# EAGLE board CT_schematic (EAGLE 7.6.0)

Size 100 x 80 mm. Coordinates in mm from the lower left corner, seen from the top.
Outline: 0,0 100,0 100,80 0,80 0,0
Copper layers (1*16): Top 0.035mm / dielectric 1.5mm / Bottom 0.035mm
Design rules "default": minimum track width 10mil, minimum drill 24mil, track to track 8mil, track to pad 8mil, pad to pad 8mil, via to via 8mil, smd to smd 8mil, copper to edge 40mil, drill to drill 8mil, minimum pad ring 10mil, minimum via ring 8mil, stop-mask expansion 4mil, vias tented up to drill 0mil, thermal gap 10mil

## Footprints (pad centres in the part's own frame; a part is rotated, then mirrored left to right if it is on the bottom)
C0603 = smd 0.8 x 0.8: 1 -0.762,0; 2 0.762,0
C0402 = smd 0.5 x 0.5: 1 -0.508,0; 2 0.508,0
C0805 = smd 1.2 x 1.3: 1 -1.016,0; 2 1.016,0
R0603 = smd 0.8 x 0.8: 1 -0.762,0; 2 0.762,0
C1206 = smd 1.3 x 1.6: 1 -1.524,0; 2 1.524,0
L0603 = smd 0.8 x 0.8: 1 -0.762,0; 2 0.762,0
L1210 = smd 1.2 x 2.5: 1 -1.524,0; 2 1.524,0
L0806 = smd 1.016 x 1.524: 1 -0.889,0; 2 0.889,0
UFBGA100 = smd 0.28 x 0.28: A1 -2.75,2.75; A2 -2.25,2.75; A3 -1.75,2.75; A4 -1.25,2.75; A5 -0.75,2.75; A6 -0.25,2.75; A7 0.25,2.75; A8 0.75,2.75; A9 1.25,2.75; A10 1.75,2.75; A11 2.25,2.75; A12 2.75,2.75; B1 -2.75,2.25; B2 -2.25,2.25; B3 -1.75,2.25; B4 -1.25,2.25; B5 -0.75,2.25; B6 -0.25,2.25; B7 0.25,2.25; B8 0.75,2.25; B9 1.25,2.25; B10 1.75,2.25; B11 2.25,2.25; B12 2.75,2.25; C1 -2.75,1.75; C2 -2.25,1.75; C3 -1.75,1.75; C4 -1.25,1.75; C5 -0.75,1.75; C8 0.75,1.75; C9 1.25,1.75; C10 1.75,1.75; C11 2.25,1.75; C12 2.75,1.75; D1 -2.75,1.25; D2 -2.25,1.25; D3 -1.75,1.25; D10 1.75,1.25; D11 2.25,1.25; D12 2.75,1.25; E1 -2.75,0.75; E2 -2.25,0.75; E3 -1.75,0.75; E10 1.75,0.75; E11 2.25,0.75; E12 2.75,0.75; F1 -2.75,0.25; F2 -2.25,0.25; F11 2.25,0.25; F12 2.75,0.25; G1 -2.75,-0.25; G2 -2.25,-0.25; G11 2.25,-0.25; G12 2.75,-0.25; H1 -2.75,-0.75; H2 -2.25,-0.75; H3 -1.75,-0.75; H10 1.75,-0.75; H11 2.25,-0.75; H12 2.75,-0.75; J1 -2.75,-1.25; J2 -2.25,-1.25; J3 -1.75,-1.25; J10 1.75,-1.25; J11 2.25,-1.25; J12 2.75,-1.25; K1 -2.75,-1.75; K2 -2.25,-1.75; K3 -1.75,-1.75; K4 -1.25,-1.75; K5 -0.75,-1.75; K8 0.75,-1.75; K9 1.25,-1.75; K10 1.75,-1.75; K11 2.25,-1.75; K12 2.75,-1.75; L1 -2.75,-2.25; L2 -2.25,-2.25; L3 -1.75,-2.25; L4 -1.25,-2.25; L5 -0.75,-2.25; L6 -0.25,-2.25; L7 0.25,-2.25; L8 0.75,-2.25; L9 1.25,-2.25; L10 1.75,-2.25; L11 2.25,-2.25; L12 2.75,-2.25; M1 -2.75,-2.75; M2 -2.25,-2.75; M3 -1.75,-2.75; M4 -1.25,-2.75; M5 -0.75,-2.75; M6 -0.25,-2.75; M7 0.25,-2.75; M8 0.75,-2.75; M9 1.25,-2.75; M10 1.75,-2.75; M11 2.25,-2.75; M12 2.75,-2.75
DFN-10 = smd 0.965 x 0.305: 1 -1.321,1; 2 -1.321,0.5; 3 -1.321,0; 4 -1.321,-0.5; 5 -1.321,-1; 6 1.321,-1; 7 1.321,-0.5; 8 1.321,0; 9 1.321,0.5; 10 1.321,1
TFBGA-153 = smd 0.3 x 0.3: A1 -3.25,3.25; A2 -2.75,3.25; A3 -2.25,3.25; A4 -1.75,3.25; A5 -1.25,3.25; A6 -0.75,3.25; A7 -0.25,3.25; A8 0.25,3.25; A9 0.75,3.25; A10 1.25,3.25; A11 1.75,3.25; A12 2.25,3.25; A13 2.75,3.25; A14 3.25,3.25; B1 -3.25,2.75; B2 -2.75,2.75; B3 -2.25,2.75; B4 -1.75,2.75; B5 -1.25,2.75; B6 -0.75,2.75; B7 -0.25,2.75; B8 0.25,2.75; B9 0.75,2.75; B10 1.25,2.75; B11 1.75,2.75; B12 2.25,2.75; B13 2.75,2.75; B14 3.25,2.75; C1 -3.25,2.25; C2 -2.75,2.25; C3 -2.25,2.25; C4 -1.75,2.25; C5 -1.25,2.25; C6 -0.75,2.25; C7 -0.25,2.25; C8 0.25,2.25; C9 0.75,2.25; C10 1.25,2.25; C11 1.75,2.25; C12 2.25,2.25; C13 2.75,2.25; C14 3.25,2.25; D1 -3.25,1.75; D2 -2.75,1.75; D3 -2.25,1.75; D4 -1.75,1.75; D12 2.25,1.75; D13 2.75,1.75; D14 3.25,1.75; E1 -3.25,1.25; E2 -2.75,1.25; E3 -2.25,1.25; E5 -1.25,1.25; E6 -0.75,1.25; E7 -0.25,1.25; E8 0.25,1.25; E9 0.75,1.25; E10 1.25,1.25; E12 2.25,1.25; E13 2.75,1.25; E14 3.25,1.25; F1 -3.25,0.75; F2 -2.75,0.75; F3 -2.25,0.75; F5 -1.25,0.75; F10 1.25,0.75; F12 2.25,0.75; F13 2.75,0.75; F14 3.25,0.75; G1 -3.25,0.25; G2 -2.75,0.25; G3 -2.25,0.25; G5 -1.25,0.25; G10 1.25,0.25; G12 2.25,0.25; G13 2.75,0.25; G14 3.25,0.25; H1 -3.25,-0.25; H2 -2.75,-0.25; H3 -2.25,-0.25; H5 -1.25,-0.25; H10 1.25,-0.25; H12 2.25,-0.25; H13 2.75,-0.25; H14 3.25,-0.25; J1 -3.25,-0.75; J2 -2.75,-0.75; J3 -2.25,-0.75; J5 -1.25,-0.75; J10 1.25,-0.75; J12 2.25,-0.75; J13 2.75,-0.75; J14 3.25,-0.75; K1 -3.25,-1.25; K2 -2.75,-1.25; K3 -2.25,-1.25; K5 -1.25,-1.25; K6 -0.75,-1.25; K7 -0.25,-1.25; K8 0.25,-1.25; K9 0.75,-1.25; K10 1.25,-1.25; K12 2.25,-1.25; K13 2.75,-1.25; K14 3.25,-1.25; L1 -3.25,-1.75; L2 -2.75,-1.75; L3 -2.25,-1.75; L12 2.25,-1.75; L13 2.75,-1.75; L14 3.25,-1.75; M1 -3.25,-2.25; M2 -2.75,-2.25; M3 -2.25,-2.25; M4 -1.75,-2.25; M5 -1.25,-2.25; M6 -0.75,-2.25; M7 -0.25,-2.25; M8 0.25,-2.25; M9 0.75,-2.25; M10 1.25,-2.25; M11 1.75,-2.25; M12 2.25,-2.25; M13 2.75,-2.25; M14 3.25,-2.25; N1 -3.25,-2.75; N2 -2.75,-2.75; N3 -2.25,-2.75; N4 -1.75,-2.75; N5 -1.25,-2.75; N6 -0.75,-2.75; N7 -0.25,-2.75; N8 0.25,-2.75; N9 0.75,-2.75; N10 1.25,-2.75; N11 1.75,-2.75; N12 2.25,-2.75; N13 2.75,-2.75; N14 3.25,-2.75; P1 -3.25,-3.25; P2 -2.75,-3.25; P3 -2.25,-3.25; P4 -1.75,-3.25; P5 -1.25,-3.25; P6 -0.75,-3.25; P7 -0.25,-3.25; P8 0.25,-3.25; P9 0.75,-3.25; P10 1.25,-3.25; P11 1.75,-3.25; P12 2.25,-3.25; P13 2.75,-3.25; P14 3.25,-3.25
FCI_10118193-0001LF = smd 0.4 x 1.35: 1 -1.3,2.675; 2 -0.65,2.675; 3 0,2.675; 4 0.65,2.675; 5 1.3,2.675 | smd 1.6 x 1.4: 6 -3.2,2.45; 7 3.2,2.45 | smd 1.9 x 1.9: 8 -1.2,0; 9 1.2,0 | hole 0.5: -3.3,0; 3.3,0
SOT143B = smd 1 x 0.7: 1 -0.75,-1 | smd 0.6 x 0.7: 2 0.95,-1; 3 0.95,1; 4 -0.95,1
ABLS-25.000MHZ-B2F-T = smd 5.6 x 2.8: 1 -3.81,0; 2 5.69,0
ASEK = smd 1.4 x 1: 1 -1.1,-0.8; 2 1.1,-0.8; 3 1.1,0.8; 4 -1.1,0.8
TSOT-23-5 = smd 1.3 x 0.62: 1 -1.31,0.95; 2 -1.31,0; 3 -1.31,-0.95; 4 1.31,-0.95; 5 1.31,0.95
DFN8_2X3MC = smd 0.813 x 0.305: 1 -1.398,0.75; 2 -1.398,0.25; 3 -1.398,-0.25; 4 -1.398,-0.75; 5 1.398,-0.75; 6 1.398,-0.25; 7 1.398,0.25; 8 1.398,0.75 | smd 1.753 x 1.549: 9 0,0
JST-2-SMD = smd 1 x 4.6: 1 -1,-3.7; 2 1,-3.7 | smd 1.6 x 3.4: NC1 -3.4,1.5; NC2 3.4,1.5
QFN-38_UHF = smd 0.75 x 0.3: 1 -2.4,2.75; 2 -2.4,2.25; 3 -2.4,1.75; 4 -2.4,1.25; 6 -2.4,0.25; 7 -2.4,-0.25; 8 -2.4,-0.75; 9 -2.4,-1.25; 10 -2.4,-1.75; 11 -2.4,-2.25; 12 -2.4,-2.75; 20 2.4,-2.75; 21 2.4,-2.25; 22 2.4,-1.75; 23 2.4,-1.25; 24 2.4,-0.75; 25 2.4,-0.25; 26 2.4,0.25; 27 2.4,0.75; 28 2.4,1.25; 29 2.4,1.75; 30 2.4,2.25; 31 2.4,2.75 | smd 0.758 x 0.3: 5 -2.4,0.75 | smd 0.3 x 0.75: 13 -1.5,-3.4; 14 -1,-3.4; 15 -0.5,-3.4; 16 0,-3.4; 17 0.5,-3.4; 18 1,-3.4; 19 1.5,-3.4; 32 1.5,3.4; 33 1,3.4; 34 0.5,3.4; 35 0,3.4; 36 -0.5,3.4; 37 -1,3.4; 38 -1.5,3.4 | smd 3.2 x 5.2: 39 0,0
IRF8306MTRPBF = smd 0.9 x 1.85: 1 0,0; 2 0,-2.35; 6 6.4,0; 7 6.4,-2.35 | smd 0.75 x 0.75: 3 1.75,-1.175 | smd 1.45 x 0.87: 4 3.5,-0.565; 5 3.5,-1.785
SW_4-1437565-2 = smd 1.4 x 2.1: 1 -2.23,4.55; 2 -2.23,-4.55; 3 2.23,4.55; 4 2.23,-4.55
LGM67K-G1J2-24-Z = smd 0.8 x 1.4: A -2,0; C 0,0
NC7SZ125M5X = smd 1.3 x 0.7: 1 -1.3,0.95; 2 -1.3,0; 3 -1.3,-0.95; 4 1.3,-0.95; 5 1.3,0.95

## Placement (x,y rotation side)
C1  1e-06  [C0603]  -58.42,62.23 0 top  (outside the outline)
C2  1e-07  [C0603]  -62.23,62.23 0 top  (outside the outline)
C3  1e-07  [C0603]  -66.04,62.23 0 top  (outside the outline)
C4  1e-07  [C0603]  -69.85,62.23 0 top  (outside the outline)
C5  1e-07  [C0603]  -73.66,62.23 0 top  (outside the outline)
C6  1e-07  [C0603]  -15.24,67.31 0 top  (outside the outline)
C7  1e-07  [C0603]  -19.05,67.31 0 top  (outside the outline)
C8  4.7e-06  [C0603]  -39.37,62.23 0 top  (outside the outline)
C9  1e-08  [C0603]  -22.86,67.31 0 top  (outside the outline)
C10  1e-06  [C0603]  -26.67,67.31 0 top  (outside the outline)
C11  1e-07  [C0402]  -27.94,72.39 0 top  (outside the outline)
C12  1e-07  [C0402]  -31.75,72.39 0 top  (outside the outline)
C13  1e-11  [C0402]  -35.56,72.39 0 top  (outside the outline)
C14  1e-11  [C0402]  -39.37,72.39 0 top  (outside the outline)
C16  1e-07  [C0402]  -43.18,72.39 0 top  (outside the outline)
C17  1e-07  [C0402]  -46.99,72.39 0 top  (outside the outline)
C18  1e-06  [C0603]  -30.48,67.31 0 top  (outside the outline)
C19  1e-07  [C0402]  -50.8,72.39 0 top  (outside the outline)
C20  1e-07  [C0402]  -54.61,72.39 0 top  (outside the outline)
C21  1e-07  [C0402]  -58.42,72.39 0 top  (outside the outline)
C22  1e-07  [C0402]  -62.23,72.39 0 top  (outside the outline)
C23  1e-06  [C0603]  -34.29,67.31 0 top  (outside the outline)
C24  1e-07  [C0402]  -66.04,72.39 0 top  (outside the outline)
C25  1e-07  [C0402]  -69.85,72.39 0 top  (outside the outline)
C26  1e-07  [C0402]  -73.66,72.39 0 top  (outside the outline)
C27  2.2e-06  [C0603]  -43.18,62.23 0 top  (outside the outline)
C28  2.2e-06  [C0603]  -46.99,62.23 0 top  (outside the outline)
C29  1e-07  [C0402]  -15.24,77.47 0 top  (outside the outline)
C30  1e-07  [C0402]  -19.05,77.47 0 top  (outside the outline)
C31  2.2e-06  [C0603]  -50.8,62.23 0 top  (outside the outline)
C32  1e-08  [C0402]  -22.86,77.47 0 top  (outside the outline)
C33  1e-05  [C0805]  -59.69,39.37 0 top  (outside the outline)
C34  1e-05  [C0805]  -64.77,39.37 0 top  (outside the outline)
C35  1e-05  [C0805]  -69.85,39.37 0 top  (outside the outline)
C36  1e-05  [C0805]  -15.24,46.99 0 top  (outside the outline)
C37  1e-05  [C0805]  -20.32,46.99 0 top  (outside the outline)
C38  1e-05  [C0805]  -25.4,46.99 0 top  (outside the outline)
C39  1e-07  [C0402]  -26.67,77.47 0 top  (outside the outline)
C40  2.2e-06  [C0603]  -54.61,62.23 0 top  (outside the outline)
C41  2.45e-08  [R0603]  -36.83,52.07 0 top  (outside the outline)
C42  2.8258362168397e-09  [R0603]  -54.61,45.72 0 top  (outside the outline)
C43  7.105e-09  [R0603]  -26.67,52.07 0 top  (outside the outline)
C44  1e-05  [C1206]  -29.21,40.64 0 top  (outside the outline)
C45  1e-05  [C1206]  -35.56,40.64 0 top  (outside the outline)
C46  1e-08  [C0402]  -30.48,77.47 0 top  (outside the outline)
C47  1e-08  [C0402]  -34.29,77.47 0 top  (outside the outline)
F1  240.0  [L0603]  -38.1,67.31 0 top  (outside the outline)
I1  1.5e-05  [L1210]  -16.51,40.64 0 top  (outside the outline)
I2  3.3e-06  [L0806]  -41.91,40.64 0 top  (outside the outline)
I3  1.5e-05  [L1210]  -22.86,40.64 0 top  (outside the outline)
R2  1000.0  [R0603]  -41.91,67.31 0 top  (outside the outline)
R7  4700.0  [R0603]  -45.72,67.31 0 top  (outside the outline)
R8  4700.0  [R0603]  -49.53,67.31 0 top  (outside the outline)
R9  2200.0  [R0603]  -53.34,67.31 0 top  (outside the outline)
R11  2200.0  [R0603]  -57.15,67.31 0 top  (outside the outline)
R13  2200.0  [R0603]  -60.96,67.31 0 top  (outside the outline)
R15  2200.0  [R0603]  -64.77,67.31 0 top  (outside the outline)
R17  10000.0  [R0603]  -41.91,52.07 0 top  (outside the outline)
R18  10000.0  [R0603]  -46.99,52.07 0 top  (outside the outline)
R19  10000.0  [R0603]  -52.07,52.07 0 top  (outside the outline)
R20  34000.0  [R0603]  -57.15,52.07 0 top  (outside the outline)
R21  34000.0  [R0603]  -62.23,52.07 0 top  (outside the outline)
R22  34000.0  [R0603]  -67.31,52.07 0 top  (outside the outline)
R23  34000.0  [R0603]  -72.39,52.07 0 top  (outside the outline)
R24  34000.0  [R0603]  -15.24,57.15 0 top  (outside the outline)
R25  34000.0  [R0603]  -20.32,57.15 0 top  (outside the outline)
R26  34000.0  [R0603]  -25.4,57.15 0 top  (outside the outline)
R27  34000.0  [R0603]  -30.48,57.15 0 top  (outside the outline)
R28  34000.0  [R0603]  -35.56,57.15 0 top  (outside the outline)
R29  34000.0  [R0603]  -40.64,57.15 0 top  (outside the outline)
R30  1000000.0  [R0603]  -59.69,45.72 0 top  (outside the outline)
R31  1000000.0  [R0603]  -64.77,45.72 0 top  (outside the outline)
R32  220000.0  [R0603]  -31.75,52.07 0 top  (outside the outline)
R33  1000000.0  [R0603]  -69.85,45.72 0 top  (outside the outline)
R34  1000000.0  [R0603]  -16.51,52.07 0 top  (outside the outline)
R35  1000000.0  [R0603]  -21.59,52.07 0 top  (outside the outline)
R36  10000.0  [R0603]  -45.72,57.15 0 top  (outside the outline)
R37  75000.0  [R0603]  -50.8,57.15 0 top  (outside the outline)
R38  10000.0  [R0603]  -55.88,57.15 0 top  (outside the outline)
R39  10000.0  [R0603]  -60.96,57.15 0 top  (outside the outline)
R40  95300.0  [R0603]  -66.04,57.15 0 top  (outside the outline)
R41  95300.0  [R0603]  -71.12,57.15 0 top  (outside the outline)
R42  10000.0  [R0603]  -15.24,62.23 0 top  (outside the outline)
R43  10000.0  [R0603]  -20.32,62.23 0 top  (outside the outline)
R44  10000.0  [R0603]  -25.4,62.23 0 top  (outside the outline)
R45  24000.0  [R0603]  -30.48,62.23 0 top  (outside the outline)
R46  2000.0  [R0603]  -68.58,67.31 0 top  (outside the outline)
R47  10000.0  [R0603]  -35.56,62.23 0 top  (outside the outline)
U1  STM32F411VEH6  [UFBGA100]  -58.42,6.35 0 top  (outside the outline)
U2  MAG3110FCR1  [DFN-10]  -15.24,72.39 0 top  (outside the outline)
U3  MAG3110FCR1  [DFN-10]  -21.59,72.39 0 top  (outside the outline)
U4  mtfc4gmcdm  [TFBGA-153]  -20.32,8.89 0 top  (outside the outline)
U5  10118193-0001LF  [FCI_10118193-0001LF]  -64.77,21.59 0 top  (outside the outline)
U6  prtr5v0u2ax  [SOT143B]  -46.99,77.47 0 top  (outside the outline)
U7  ABLS-25.000MHZ-B2F-T  [ABLS-25.000MHZ-B2F-T]  -54.61,33.02 0 top  (outside the outline)
U8  ASEK-32.768KHz-ECST  [ASEK]  -38.1,33.02 0 top  (outside the outline)
U9  ltc3406es5  [TSOT-23-5]  -30.48,45.72 0 top  (outside the outline)
U10  ltc3406es5  [TSOT-23-5]  -36.83,45.72 0 top  (outside the outline)
U11  ltc3406es5  [TSOT-23-5]  -43.18,45.72 0 top  (outside the outline)
U12  MCP73831T-2ACI/MC  [DFN8_2X3MC]  -50.8,76.2 0 top  (outside the outline)
U13  S2B-PH-SM4-TB(LF)(SN)  [JST-2-SMD]  -22.86,24.13 0 top  (outside the outline)
U14  LTC2928CUHF#PBF  [QFN-38_UHF]  -16.51,33.02 0 top  (outside the outline)
U15  IRF8306MTRPbF  [IRF8306MTRPBF]  -41.91,24.13 0 top  (outside the outline)
U16  IRF8306MTRPbF  [IRF8306MTRPBF]  -57.15,24.13 0 top  (outside the outline)
U17  4-1437565-2  [SW_4-1437565-2]  -41.91,6.35 0 top  (outside the outline)
U18  Q65110A2395  [LGM67K-G1J2-24-Z]  -66.04,31.75 0 top  (outside the outline)
U19  nc7sz125m5x  [NC7SZ125M5X]  -46.99,39.37 0 top  (outside the outline)
U20  nc7sz125m5x  [NC7SZ125M5X]  -53.34,39.37 0 top  (outside the outline)

## Library data of the parts
C1-C14 C16-C47 F1 I1-I3 R2 R7-R9 R11 R13 R15 R17-R47 U1-U20 = circuit_tree

## Nets
CLK_CRYSTAL_U1_F1: C13.1 U1.F1 U7.1
CLK_CRYSTAL_U1_G1: C14.1 U1.G1 U7.2
CLK_U1_D1: U1.D1 U8.3
GND: C1.2 C2.2 C3.2 C4.2 C5.2 C6.2 C7.2 C8.2 C9.2 C10.2 C11.2 C12.2 C13.2 C14.2 C16.2 C17.2 C18.2 C19.2 C20.2 C21.2 C22.2 C23.2 C24.2 C25.2 C26.2 C27.2 C28.2 C29.2 C30.2 C31.2 C32.2 C33.2 C34.1 C34.2 C35.2 C36.1 C36.2 C37.2 C38.1 C38.2 C39.2 C40.2 C41.2 C42.2 C43.2 C44.2 C45.2 C46.2 C47.2 R2.2 R17.2 R30.2 R32.2 R34.2 R37.2 R40.2 R41.2 R42.2 R43.2 R44.2 R46.2 U1.D3 U1.F2 U1.F11 U1.F12 U1.J1 U1.K1 U2.5 U2.10 U3.5 U3.10 U4.C4 U4.E7 U4.G5 U4.H10 U4.K8 U4.N2 U4.N5 U4.P4 U4.P6 U5.5 U5.6 U5.7 U5.8 U5.9 U6.1 U8.2 U9.2 U10.2 U11.2 U12.6 U12.9 U13.2 U14.8 U14.9 U14.10 U14.12 U14.13 U14.24 U14.25 U14.30 U14.32 U14.39 U18.C U19.1 U19.3 U20.1 U20.3
INPUT_USBPOWER_5V: C44.1 R47.2 U5.1 U6.4 U12.1 U12.2
NET_U1_A4: R17.1 U1.A4
NET_U1_A8: R15.1 U1.A8 U2.6
NET_U1_B4: R11.1 U1.B4 U3.6
NET_U1_B5: R9.1 U1.B5 U3.7
NET_U1_C11: C12.1 U1.C11
NET_U1_E3: R19.1 U1.E3
NET_U1_H2: R8.1 U1.H2 U20.4
NET_U1_H3: R18.1 U1.H3
NET_U1_L10: R13.1 U1.L10 U2.7
NET_U1_M1: C9.1 C10.1 F1.1 U1.L1 U1.M1
NET_U1_M11: U18.A
NET_U1_M12: U17.3 U17.4
NET_U2_1: C16.1 U2.1
NET_U2_4: C19.1 U2.4
NET_U3_1: C21.1 U3.1
NET_U3_4: C24.1 U3.4
NET_U4_C2: C28.1 C29.1 U4.C2
NET_U4_K5: R7.1 U4.K5 U19.4
NET_U9_1: U9.1
NET_U9_3: I1.1 U9.3
NET_U9_5: R30.1 R31.1 U9.5
NET_U9_ATNET_3: I1.2 R31.2
NET_U10_1: U10.1
NET_U10_3: I2.1 U10.3
NET_U10_5: R32.1 R33.1 U10.5
NET_U10_ATNET_3: I2.2 R33.2
NET_U11_1: U11.1
NET_U11_3: I3.1 U11.3
NET_U11_5: R34.1 R35.1 U11.5
NET_U11_ATNET_3: I3.2 R35.2
NET_U12_5: R47.1 U12.5
NET_U12_8: R46.1 U12.8
NET_U14_3: R43.1 U14.3
NET_U14_6: R40.1 U14.6
NET_U14_7: R41.1 U14.7
NET_U14_16: R42.1 R45.1 U14.16
NET_U14_18: R39.1 U14.18
NET_U14_19: R38.1 U14.19 U14.20
NET_U14_21: R36.1 R37.1 U14.21 U19.2 U20.2
NET_U14_26: C42.1 U14.26
NET_U14_27: C41.1 U14.27
NET_U14_28: C43.1 U14.28
NET_U14_38: R44.1 U14.38
NET_U15_3: U14.2 U15.3
NET_U16_3: U14.37 U16.3
NET_U17_1: R2.1 U17.1 U17.2
PROC_SDIO_CK: R29.1 U1.B10 U4.M6
PROC_SDIO_CMD: R28.1 U1.C8 U4.M5
PROC_SDIO_D0: R20.1 U1.A7 U4.A3
PROC_SDIO_D1: R21.1 U1.D11 U4.A4
PROC_SDIO_D2: R22.1 U1.B11 U4.A5
PROC_SDIO_D3: R23.1 U1.C5 U4.B2
PROC_SDIO_D4: R24.1 U1.A3 U4.B3
PROC_SDIO_D5: R25.1 U1.B3 U4.B4
PROC_SDIO_D6: R26.1 U1.E12 U4.B5
PROC_SDIO_D7: R27.1 U1.E11 U4.B6
PROC_USB_OTG_FS_DM: U5.2 U6.3
PROC_USB_OTG_FS_DP: U5.3 U6.2
VCC_3V7: C39.1 C40.1 C45.1 R36.2 R38.2 R39.2 R45.2 U12.3 U12.4 U13.1 U14.11 U14.22 U15.1 U15.2 U15.6 U15.7 U16.1 U16.2 U16.6 U16.7
VCC_S1_3V7: C33.1 C35.1 U9.4 U10.4 U15.4 U15.5
VCC_S2_3V7: C37.1 U11.4 U16.4 U16.5
VCC_TIER1_1V2: C11.1 C34.2 I1.2 R31.2 U1.L11
VCC_TIER1_3V3: C1.1 C2.1 C3.1 C4.1 C5.1 C6.1 C7.1 C8.1 C17.1 C18.1 C20.1 C22.1 C23.1 C25.1 C26.1 C27.1 C30.1 C31.1 C32.1 C36.2 C46.1 C47.1 F1.2 I2.2 R7.2 R8.2 R9.2 R11.2 R13.2 R15.2 R18.2 R19.2 R20.2 R21.2 R22.2 R23.2 R24.2 R25.2 R26.2 R27.2 R28.2 R29.2 R33.2 U1.C4 U1.E2 U1.G2 U1.G11 U1.G12 U2.2 U2.8 U3.2 U3.8 U4.C6 U4.E6 U4.F5 U4.J10 U4.K9 U4.M4 U4.N4 U4.P3 U4.P5 U8.4 U19.5 U20.5
VCC_TIER2_1V2: C38.2 I3.2 R35.2

## Tracks (layer width: path | path; a pad name or v marks a point on that pad's centre or on a via)
CLK_CRYSTAL_U1_F1  (2 unrouted)
CLK_CRYSTAL_U1_G1  (2 unrouted)
CLK_U1_D1  (1 unrouted)
GND  (107 unrouted)
INPUT_USBPOWER_5V  (5 unrouted)
NET_U1_A4  (1 unrouted)
NET_U1_A8  (2 unrouted)
NET_U1_B4  (2 unrouted)
NET_U1_B5  (2 unrouted)
NET_U1_C11  (1 unrouted)
NET_U1_E3  (1 unrouted)
NET_U1_H2  (2 unrouted)
NET_U1_H3  (1 unrouted)
NET_U1_L10  (2 unrouted)
NET_U1_M1  (4 unrouted)
NET_U1_M12  (1 unrouted)
NET_U2_1  (1 unrouted)
NET_U2_4  (1 unrouted)
NET_U3_1  (1 unrouted)
NET_U3_4  (1 unrouted)
NET_U4_C2  (2 unrouted)
NET_U4_K5  (2 unrouted)
NET_U9_3  (1 unrouted)
NET_U9_5  (2 unrouted)
NET_U9_ATNET_3  (1 unrouted)
NET_U10_3  (1 unrouted)
NET_U10_5  (2 unrouted)
NET_U10_ATNET_3  (1 unrouted)
NET_U11_3  (1 unrouted)
NET_U11_5  (2 unrouted)
NET_U11_ATNET_3  (1 unrouted)
NET_U12_5  (1 unrouted)
NET_U12_8  (1 unrouted)
NET_U14_3  (1 unrouted)
NET_U14_6  (1 unrouted)
NET_U14_7  (1 unrouted)
NET_U14_16  (2 unrouted)
NET_U14_18  (1 unrouted)
NET_U14_19  (2 unrouted)
NET_U14_21  (4 unrouted)
NET_U14_26  (1 unrouted)
NET_U14_27  (1 unrouted)
NET_U14_28  (1 unrouted)
NET_U14_38  (1 unrouted)
NET_U15_3  (1 unrouted)
NET_U16_3  (1 unrouted)
NET_U17_1  (2 unrouted)
PROC_SDIO_CK  (2 unrouted)
PROC_SDIO_CMD  (2 unrouted)
PROC_SDIO_D0  (2 unrouted)
PROC_SDIO_D1  (2 unrouted)
PROC_SDIO_D2  (2 unrouted)
PROC_SDIO_D3  (2 unrouted)
PROC_SDIO_D4  (2 unrouted)
PROC_SDIO_D5  (2 unrouted)
PROC_SDIO_D6  (2 unrouted)
PROC_SDIO_D7  (2 unrouted)
PROC_USB_OTG_FS_DM  (1 unrouted)
PROC_USB_OTG_FS_DP  (1 unrouted)
VCC_3V7  (19 unrouted)
VCC_S1_3V7  (5 unrouted)
VCC_S2_3V7  (3 unrouted)
VCC_TIER1_1V2  (4 unrouted)
VCC_TIER1_3V3  (63 unrouted)
VCC_TIER2_1V2  (2 unrouted)